# Altium PCB heater_v0.PcbDoc
Units mm, origin at the board's own origin, x right, y up, seen from the top; angles counter-clockwise.
Board outline 110 x 14 mm, 2 copper layers (Top Layer, Bottom Layer); 10 components, 43 nets, 50 pads, 8 vias.
Unrouted connection lines stored in the file: 4.
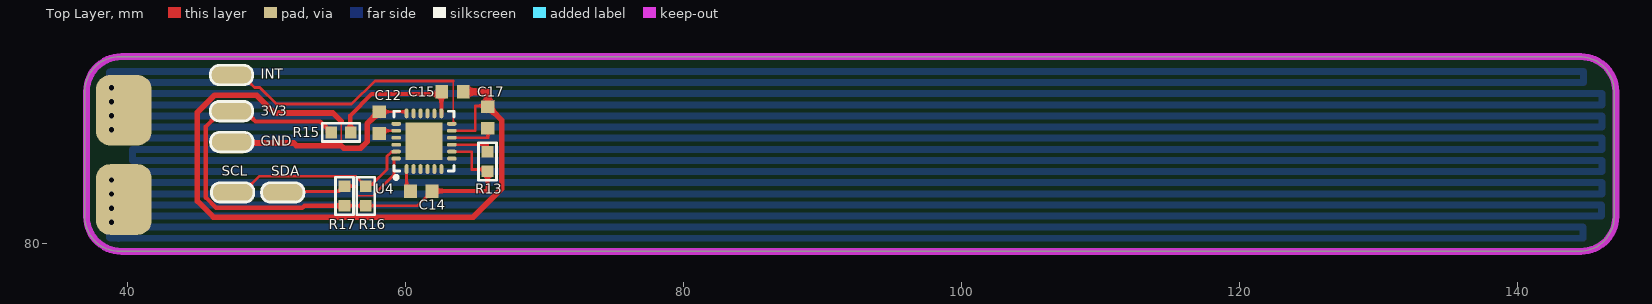
[diagram p0: Top Layer view]
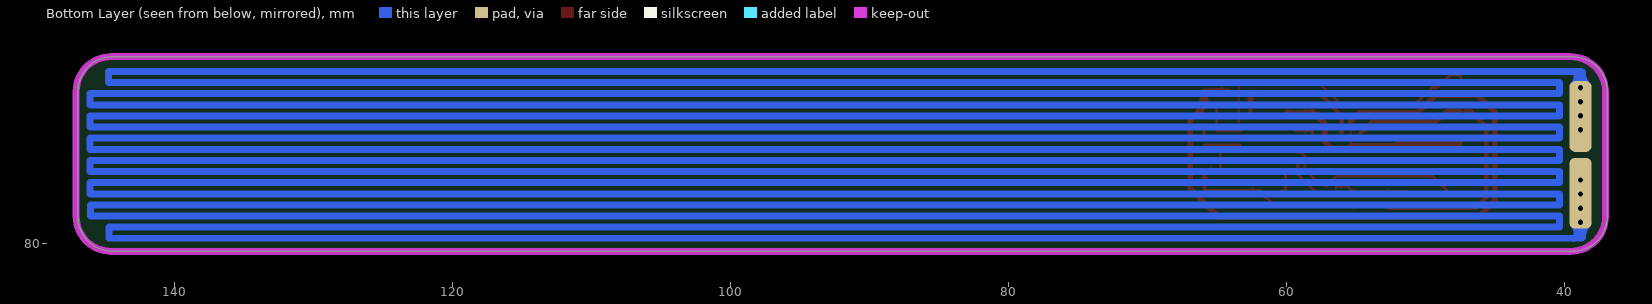
[diagram p1: Bottom Layer view, seen from below]
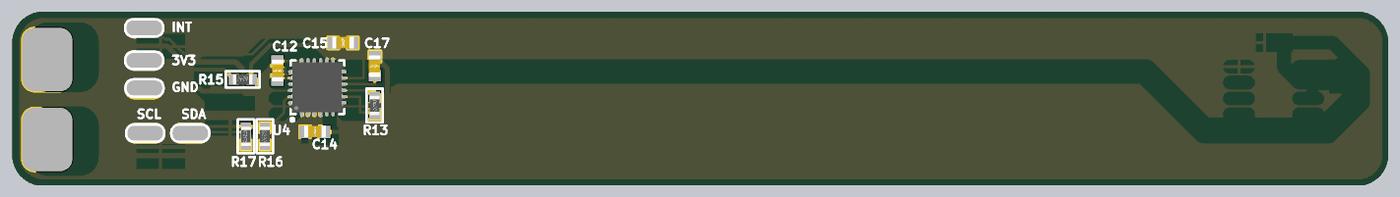
[diagram p2: 3D render of the assembled board from above, using the file's embedded part models]

## Layer stack, top to bottom
Top Solder: solder mask 0.0102, Solder Resist, Dk 3.5
Top Layer: signal copper 0.0356
Dielectric 1: dielectric 0.32, FR-4, Dk 4.8
Bottom Layer: signal copper 0.0356
Bottom Solder: solder mask 0.0102, Solder Resist, Dk 3.5

## Board outline
39.442,79.457 cw(c39.442,81.957) 36.942,81.957 36.942,90.957 cw(c39.442,90.957) 39.442,93.457 144.442,93.457 cw(c144.442,90.957) 146.942,90.957 146.942,81.957 cw(c144.442,81.957) 144.442,79.457

## Design rules (kind name [scope] priority, off if disabled: settings)
Clearance [All] p1: gap=0.254 ignorepadtopadclearanceinfootprint=FALSE except(0: Arc-Hole Track-Hole SMDPad-Hole THPad-Hole Via-Hole Fill-Hole Poly-Hole Region-Hole Text-Hole; 0.2: Arc-SMDPad Track-SMDPad)
PolygonConnect [All] p1: connectstyle=Relief reliefconductorwidth=0.254 reliefentries=4 polygonreliefangle="90 Angle" airgapwidth=0.254
RoutingVias [All] p1: holewidth=0.711 width=1.27 viastyle="Through Hole" minholewidth=0.711 minwidth=1.27 maxholewidth=0.711 maxwidth=1.27
SolderMaskExpansion [All] p1: expansion=0.102 istentingtop=FALSE
Width [All] p1: maxlimit=4 minlimit=0.1 preferedwidth=0.254
30 further rules are at their usual default settings.

## Components (designator, comment, footprint, x,y, rotation, side; value= is the part's Value field where it differs from the comment)
C12 "100nF" CAP_0603 58.42,89.281 r270 top
C14 "100nF" CAP_0603 60.579,84.074 r0 top
C15 "33pF" CAP_0603 62.822,91.212 r0 top
C17 "100nF" CAP_0603 65.659,88.519 r90 top
R13 "" R0603 65.913,85.914 r270 top
R15 "" R0603 55.372,88.011 r0 top (schematic designator R13)
R16 "" R0603 57.15,83.439 r90 top
R17 "" R0603 55.626,83.439 r90 top
RH1 "R_Heater" ? 37.719,92.905 r0 bottom
U4 "MPU-6050" QFN-24_4x4x05P 61.382,86.972 r90 top

## Footprints (in the part's own frame and the unit in brackets; to place one, negate y for a bottom-side part, rotate by r counter-clockwise, add the part's x,y. Pads: shape width x height; smd on the part's side, far side on the other; paste and mask are expansions set on the pad)
CAP_0603 [mm]
  rect 0.92x0.97 smd: 1(-0.211,-0.28) 2(1.339,-0.28)
  body extent -0.31,-0.72 1.44,0.23, height 0.87
QFN-24_4x4x05P [mm]
  rect 2.68x2.68 smd mask+0.051: 0(0.404,0.041)
  oval 0.7x0.28 smd mask+0.051: 1(-1.596,1.291) 2(-1.596,0.791) 3(-1.596,0.291) 4(-1.596,-0.209) 5(-1.596,-0.709) 6(-1.596,-1.209) 13(2.404,-1.209) 14(2.404,-0.709) 15(2.404,-0.209) 16(2.404,0.291) 17(2.404,0.791) 18(2.404,1.291)
  oval 0.28x0.7 smd mask+0.051: 7(-0.846,-1.959) 8(-0.346,-1.959) 9(0.154,-1.959) 10(0.654,-1.959) 11(1.154,-1.959) 12(1.654,-1.959) 19(1.654,2.041) 20(1.154,2.041) 21(0.654,2.041) 22(0.154,2.041) 23(-0.346,2.041) 24(-0.846,2.041)
  silkscreen extent -2.32,-2.11 2.55,2.19, body extent -1.61,-1.96 2.41,2.06, height 0.94
R0603 [mm]
  rect 0.85x0.85 smd: 1(-0.7,0) 2(0.7,0)
  silkscreen extent -1.35,-0.65 1.35,0.65, body extent -0.8,-0.4 0.8,0.4, height 0.44
? [mil]
  rrect50% 62.99x200 smd: 1(45,365) 2(45,147.67)
  rrect50% 157.48x200 smd far side: 1(80,382.67) 2(80,130)
  Top Layer lines w19.68: 23.52,451.25 ccw(c-16.26,491.03) 40,491.03 ; 23.52,61.42 cw(c-16.26,21.64) 40,21.64 ; 24.56,446.21 ccw(c-12.72,483.48) 40,483.48 40,490 cw(c45.93,484.07) 45.93,492.46 83.21,492.46 ; 40,29.19 40,22.67 ccw(c45.93,28.6) 45.93,20.21 83.21,20.21 ; 45,415 45,472.3 cw(c65.33,472.3) 65.33,492.63 4212.6,492.48 4212.6,460.98 ; 45,97.82 45,40.52 ccw(c65.33,40.52) 65.33,20.19 4213.98,20.19 4213.98,51.69 105.15,51.69 ccw(c105.15,51.54) 105,51.54 105,83.03 4265.76,83.03 ; 45,97.67 45,40.37 ccw(c65.33,40.37) 65.33,20.04 4212.6,20.19 ; 55,490 55,476.64 ccw(c86.67,476.64) 64.28,454.24 ; 55,22.67 55,36.03 cw(c86.67,36.03) 64.28,58.43 ; 4212.6,461.13 105,461.13 105,429.64 4264.38,429.64 4264.38,398.14 105,398.14 105,366.64 4265.76,366.65 4265.76,335.15 ; 4265,303.5 105,303.5 105,335 4265.76,335 ; 4265.76,303.65 4265.76,272.16 ; 4265.76,272.01 105,272.01 105,240.51 4265.76,240.51 ; 4265.76,240.66 4265.76,209.17 ; 4265.76,209.02 105,209.02 105,177.52 4265.76,177.52 ; 4265.76,177.67 4265.76,146.17 ; 4265.76,146.02 105,146.02 105,114.53 4265.76,114.53 ; 4265.76,114.68 4265.76,83.18
  Keep-Out Layer lines w19.68: 4305.13,430.99 ccw(c4206.7,430.99) 4206.7,529.42 72.84,529.42 ccw(c72.84,430.99) -25.58,430.99 -25.58,76.66 ccw(c72.84,76.66) 72.84,-21.76 4206.7,-21.76 ccw(c4206.7,76.66) 4305.13,76.66 ; 4305.13,430.99 4305.13,76.66 ; 4305.13,430.99 4305.13,76.66

## Part data
C12 C14 C17: library part "CAP - CER 0.1UF 25V X7R 0805", "CAP CER 0.1UF 50V X7R 0603", Case/Package=0603, Manufacturer="FH(Guangdong Fenghua Advanced Tech)", Manufacturer Part Number=0603F104M500NT, Supplier Part Number 1=C42998, Voltage=50V, Capacitance=100nF, Depth=0.8mm, Height=0.8mm, Length=1.6mm, Pricing 1="1=0,10000, 10=0,04400, 50=0,02420, 100=0,01980, 500=0,01412, 1000=0,01110 (USD)", Supplier 1=JLCPCB, Thickness=0.035inch, Voltage Rating=50V, Width=0.031inch
C15: library part "CAP - CER 0.1UF 25V X7R 0805", "CAP CER 0.1UF 50V X7R 0603", Capacitance=100nF, Case/Package=0603, Manufacturer="FH(Guangdong Fenghua Advanced Tech)", Manufacturer Part Number=0603F104M500NT, Supplier Part Number 1=C42998, Voltage=50V, Depth=0.8mm, Height=0.8mm, Length=1.6mm, Pricing 1="1=0,10000, 10=0,04400, 50=0,02420, 100=0,01980, 500=0,01412, 1000=0,01110 (USD)", Supplier 1=JLCPCB, Thickness=0.035inch, Voltage Rating=50V, Width=0.031inch
R13 R15: library part "Res 1k ±1% 0.063W 0402", Manufacturer="UNI-ROYAL(Uniroyal Elec)", Manufacturer Part Number=0603WAJ0472T5E, Package / Case=0603, Resistance=220, Supplier Part Number 1=C25999, ComponentLink1URL=https://lcsc.com/product-detail/Chip-Resistor-Surface-Mount_Resistor-Today-AECR0402F1K00K9_C328304.html, Supplier 1=JLCPCB
R16 R17: library part "Res 1k ±1% 0.063W 0402", Manufacturer="UNI-ROYAL(Uniroyal Elec)", Manufacturer Part Number=0603WAJ0472T5E, Package / Case=0603, Resistance=3.3k, Supplier Part Number 1=C25999, ComponentLink1URL=https://lcsc.com/product-detail/Chip-Resistor-Surface-Mount_Resistor-Today-AECR0402F1K00K9_C328304.html, Supplier 1=JLCPCB
U4: library part MPU-6050_[C24112], "传感器", Package=QFN-24_4x4x05P, SuppliersPartNumber=C24112, ComponentLink1Description=供应商链接, ComponentLink1URL=http://www.szlcsc.com/product/details_24852.html, Supplier=LC

## Free pads (board coordinates)
  oval 3x1.5 smd: P1(47.498,89.535) P2(47.498,87.249) P3(47.577,83.693) P4(51.181,83.693) P5(47.498,92.138)

## Via types
v1: diameter 0.762, hole 0.381, Top Layer to Bottom Layer, tented both sides, 8 vias

## Nets (pads, with @x,y where several pads share a name; then routed paths per layer and width w, separated by ;. In a path a pad name is that pad's centre, name@x,y a point inside that pad or via, vN(x,y) a via of type N, cw(c..) or ccw(c..) an arc to the next point about the centre after c; other vN are vias at no path point)
+3V3: C14.2 C15.1 pad.P1 R13.2 R15.1 R15.2 R16.1 R17.1 U4.8 U4.13 | length 51.4
  Top Layer w0.2: R17.1 R16.1 60.888,82.739 61.918,83.769 C14.2 ; U4.8 64.77,86.626 64.77,85.344 65.913,85.344 R13.2
  Top Layer w0.3: pad.P1@47.123,89.535 46.748,89.535 45.648,88.435 45.648,83.316 46.371,82.593 52.59,82.593 52.736,82.739 R17.1 ; pad.P1 48.483,89.535 49.214,88.804 53.879,88.804 R15.1 ; R15.2 56.041,88.042 56.041,89.237 57.578,90.774 62.453,90.774 C15.1@62.591,90.912 ; C14.2 65.913,83.794 R13.2 ; U4.13 62.591,90.774 C15.1@62.591,90.912 ; C15.1 C15.1@62.591,90.912
BAT_MON: 
DRIVA_1: 
DRIVA_2: 
DRIVA_3: 
DRIVA_4: 
DRIVB_1: 
DRIVB_2: 
DRIVB_3: 
DRIVB_4: 
DTR: 
EN: 
GND: C12.1 C14.1 C15.2 C17.2 pad.P2 U4.1 U4.11 U4.18 | length 73.1
  Top Layer w0.1: 55.384,87.061 55.384,88.816
  Top Layer w0.2: C12.1 60.091,89.492 U4.18 ; U4.1 60.091,83.794 C14.1 ; U4.11 65.024,88.126 65.024,89.916 C17.2@65.939,89.916
  Top Layer w0.4: pad.P2 51.976,87.249 52.164,87.061 55.384,87.061 55.577,86.868 56.789,86.868 57.255,87.335 57.255,88.632 58.115,89.492 C12.1 ; 55.384,88.816 54.791,89.408 50.575,89.408 49.298,90.685 46.272,90.685 45.044,89.457 45.044,83.066 46.196,81.914 64.887,81.914 66.929,83.956 66.929,88.893 65.939,89.883 C17.2@65.939,89.916
  Top Layer w0.5: C15.2 65.939,90.932 C17.2@65.939,89.916
GPIO0: 
INT: pad.P5 U4.12 | length 20.7
  Top Layer w0.1: U4.12@63.45,88.671 63.45,91.679
  Top Layer w0.2: pad.P5@47.498,91.948 pad.P5 48.248,92.138 49.147,91.239 49.527,91.239 50.72,90.046 56.137,90.046 57.808,91.717 63.45,91.717
LED: 
NetC11_1: 
NetC12_2: C12.2 U4.20 | length 1.4
  Top Layer w0.2: C12.2 58.14,88.126 U4.20
NetC17_1: C17.1 U4.10 | length 3.3
  Top Layer w0.2: U4.10 65.939,87.626 C17.1
NetC18_1: 
NetC18_2: 
NetC19_1: 
NetC19_2: 
NetD1_A: 
NetL1_1: 
NetL1_2: 
NetP2_2: 
NetP2_3: 
NetQ1_1: 
NetQ2_1: 
NetQ3_1: 
NetR5_2: 
NetR13_1: R13.1 U4.9 | length 3.1
  Top Layer w0.2: U4.9 65.913,87.126 R13.1
NetR18_2: 
NFET_GATE: 
ONEWIRE: 
R_HEAT1: RH1.1
  other v1: 38.862,81.557 38.862,82.566 38.862,83.574 38.862,84.582 38.862,88.206 38.862,89.214 38.862,90.222 38.862,91.231
R_HEAT2: RH1.2
RTS: 
SCL: pad.P3 R16.2 U4.23 | length 14.2
  Top Layer w0.2: pad.P3 48.327,83.693 49.497,84.864 56.425,84.864 R16.2 57.267,84.256 57.658,84.256 57.658,84.328 58.674,85.344 58.674,86.291 58.993,86.611 59.326,86.611 U4.23
SDA: pad.P4 R17.2 U4.24 | length 10.6
  Top Layer w0.1: pad.P4 pad.P4@51.252,83.764 ; R17.2@55.251,83.764 R17.2 ; 56.416,84.139 56.475,84.08 56.475,83.61 56.621,83.464 57.679,83.464 58.035,83.82 58.039,83.82 ; U4.24@59.181,86.043 59.264,86.126 U4.24
  Top Layer w0.2: pad.P4@51.252,83.764 R17.2@55.251,83.764 ; R17.2 56.416,84.139 ; 58.039,83.82 59.181,84.962 U4.24@59.181,86.043
VBAT: 
VIN: 
pads on no net: U4.0 U4.2 U4.3 U4.4 U4.5 U4.6 U4.7 U4.14 U4.15 U4.16 U4.17 U4.19 U4.21 U4.22

## Polygon pours and split planes (outlines as drawn)
GND on Top Layer "NONET_L-01_P-001" (solid, shelved, pour order 0): 39.493,79.457 cw(c39.493,81.957) 36.993,81.957 36.993,90.957 cw(c39.493,90.957) 39.493,93.457 144.493,93.457 cw(c144.493,90.957) 146.993,90.957 146.993,81.957 cw(c144.493,81.957) 144.493,79.457

## Silkscreen, mask and mechanical layers (free items; w line width, h text height)
Top Overlay:
  lines w0.2: 45.974,89.471 ccw(c46.609,89.471) 46.609,88.837 48.387,88.837 ccw(c48.387,89.471) 49.022,89.471 49.022,89.599 ccw(c48.387,89.599) 48.387,90.233 46.609,90.233 ccw(c46.609,89.599) 45.974,89.599 45.974,89.471 ; 45.974,92.075 ccw(c46.609,92.075) 46.609,91.44 48.387,91.44 ccw(c48.387,92.075) 49.022,92.075 49.022,92.202 ccw(c48.387,92.202) 48.387,92.837 46.609,92.837 ccw(c46.609,92.202) 45.974,92.202 45.974,92.075 ; 45.995,87.254 ccw(c46.63,87.254) 46.63,86.619 48.408,86.619 ccw(c48.408,87.254) 49.043,87.254 49.043,87.381 ccw(c48.408,87.381) 48.408,88.016 46.63,88.016 ccw(c46.63,87.381) 45.995,87.381 45.995,87.254 ; 46.053,83.63 ccw(c46.688,83.63) 46.688,82.995 48.466,82.995 ccw(c48.466,83.63) 49.101,83.63 49.101,83.757 ccw(c48.466,83.757) 48.466,84.392 46.688,84.392 ccw(c46.688,83.757) 46.053,83.757 46.053,83.63 ; 49.657,83.629 ccw(c50.292,83.629) 50.292,82.995 52.07,82.995 ccw(c52.07,83.629) 52.705,83.629 52.705,83.757 ccw(c52.07,83.757) 52.07,84.391 50.292,84.391 ccw(c50.292,83.757) 49.657,83.757 49.657,83.629
  text "INT" at 49.583,91.874 h0.7
  text "3V3" at 49.583,89.207 h0.7
  text "GND" at 49.583,87.048 h0.7
  text "SCL" at 46.789,84.889 h0.7
  text "SDA" at 50.345,84.889 h0.7
Mechanical 16:
  text "R15 is 0 Ohm" at 39.062,94.561 h0.8

## Dimensions
39.442,79.457 to 41.91,93.472 on Mechanical 13
36.942,81.957 to 146.942,81.957 on Mechanical 13